# Altium PCB Team_Upsilon_Display_pcb.PcbDoc
Units mil, origin at the board's own origin, x right, y up, seen from the top; angles counter-clockwise.
Board outline 1925 x 1400 mil, 2 copper layers (Top Layer, Bottom Layer); 12 components, 18 nets, 40 pads, 0 vias.
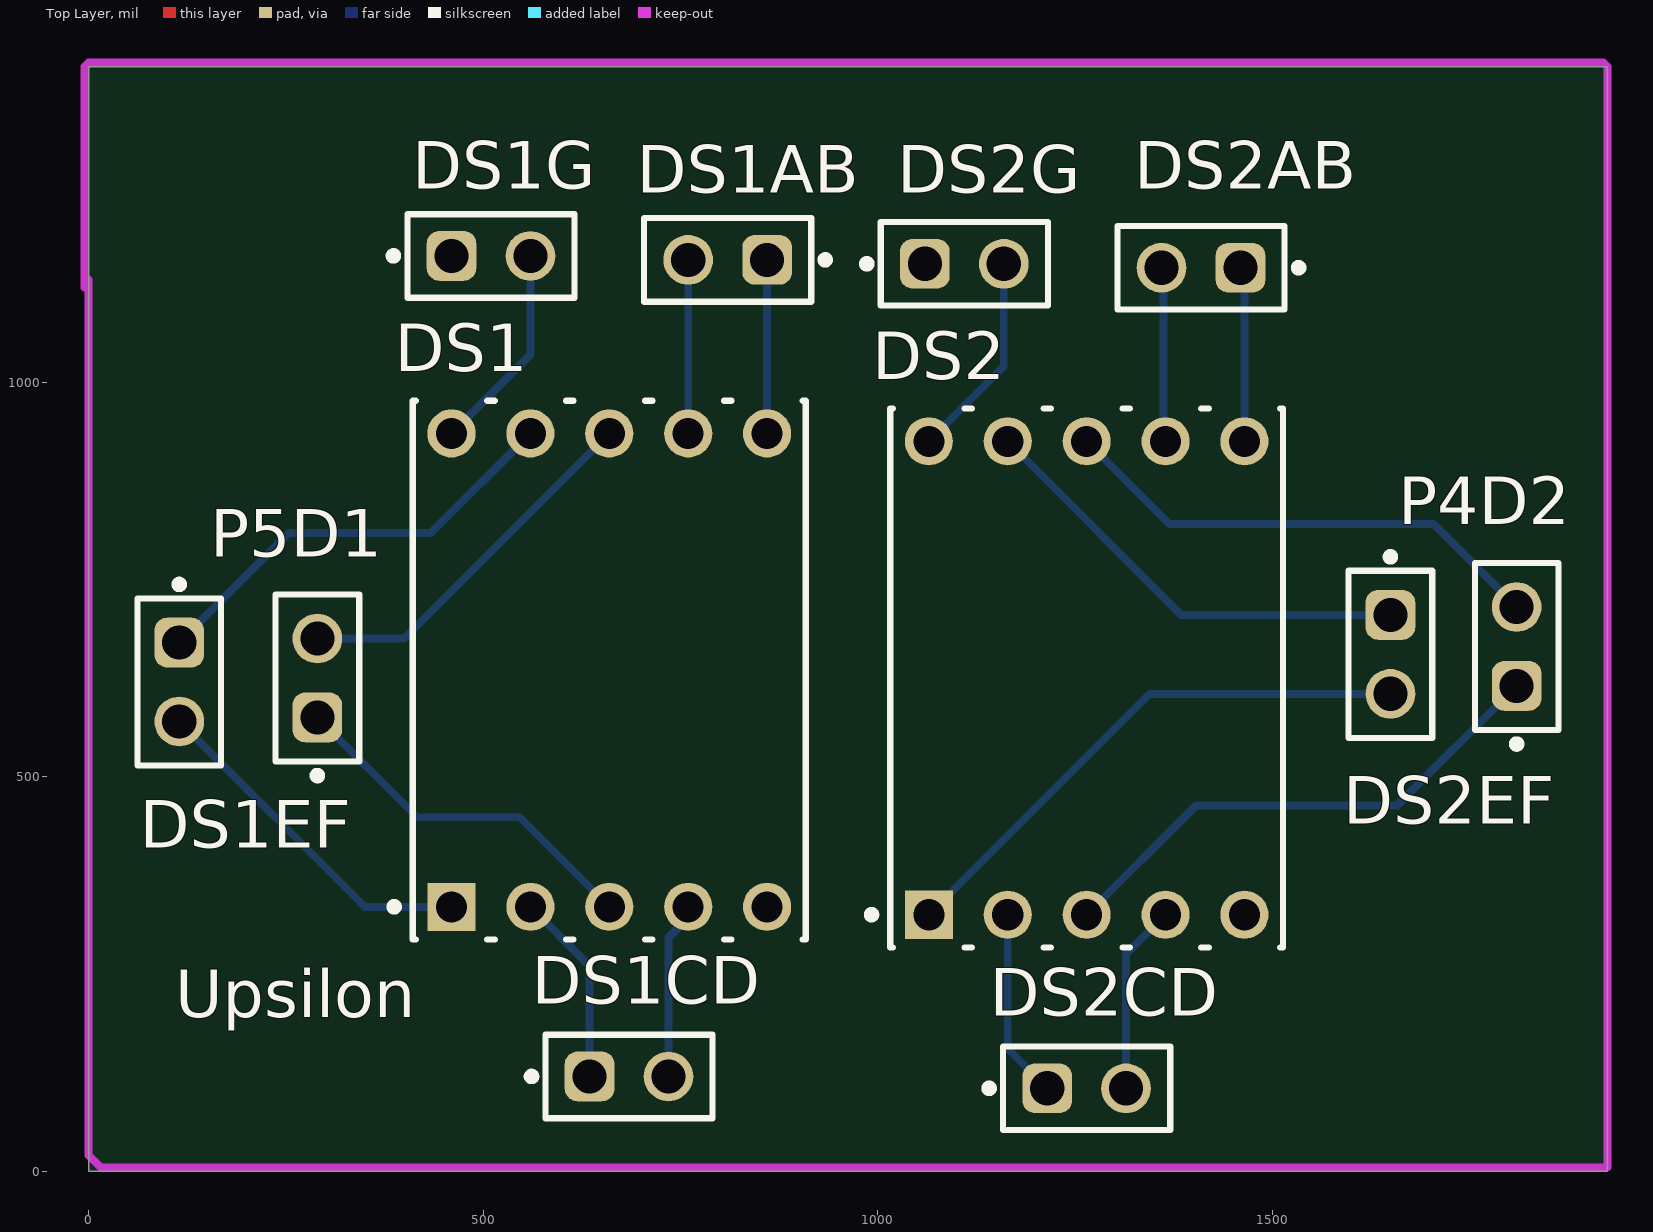
[diagram p0: Top Layer view]
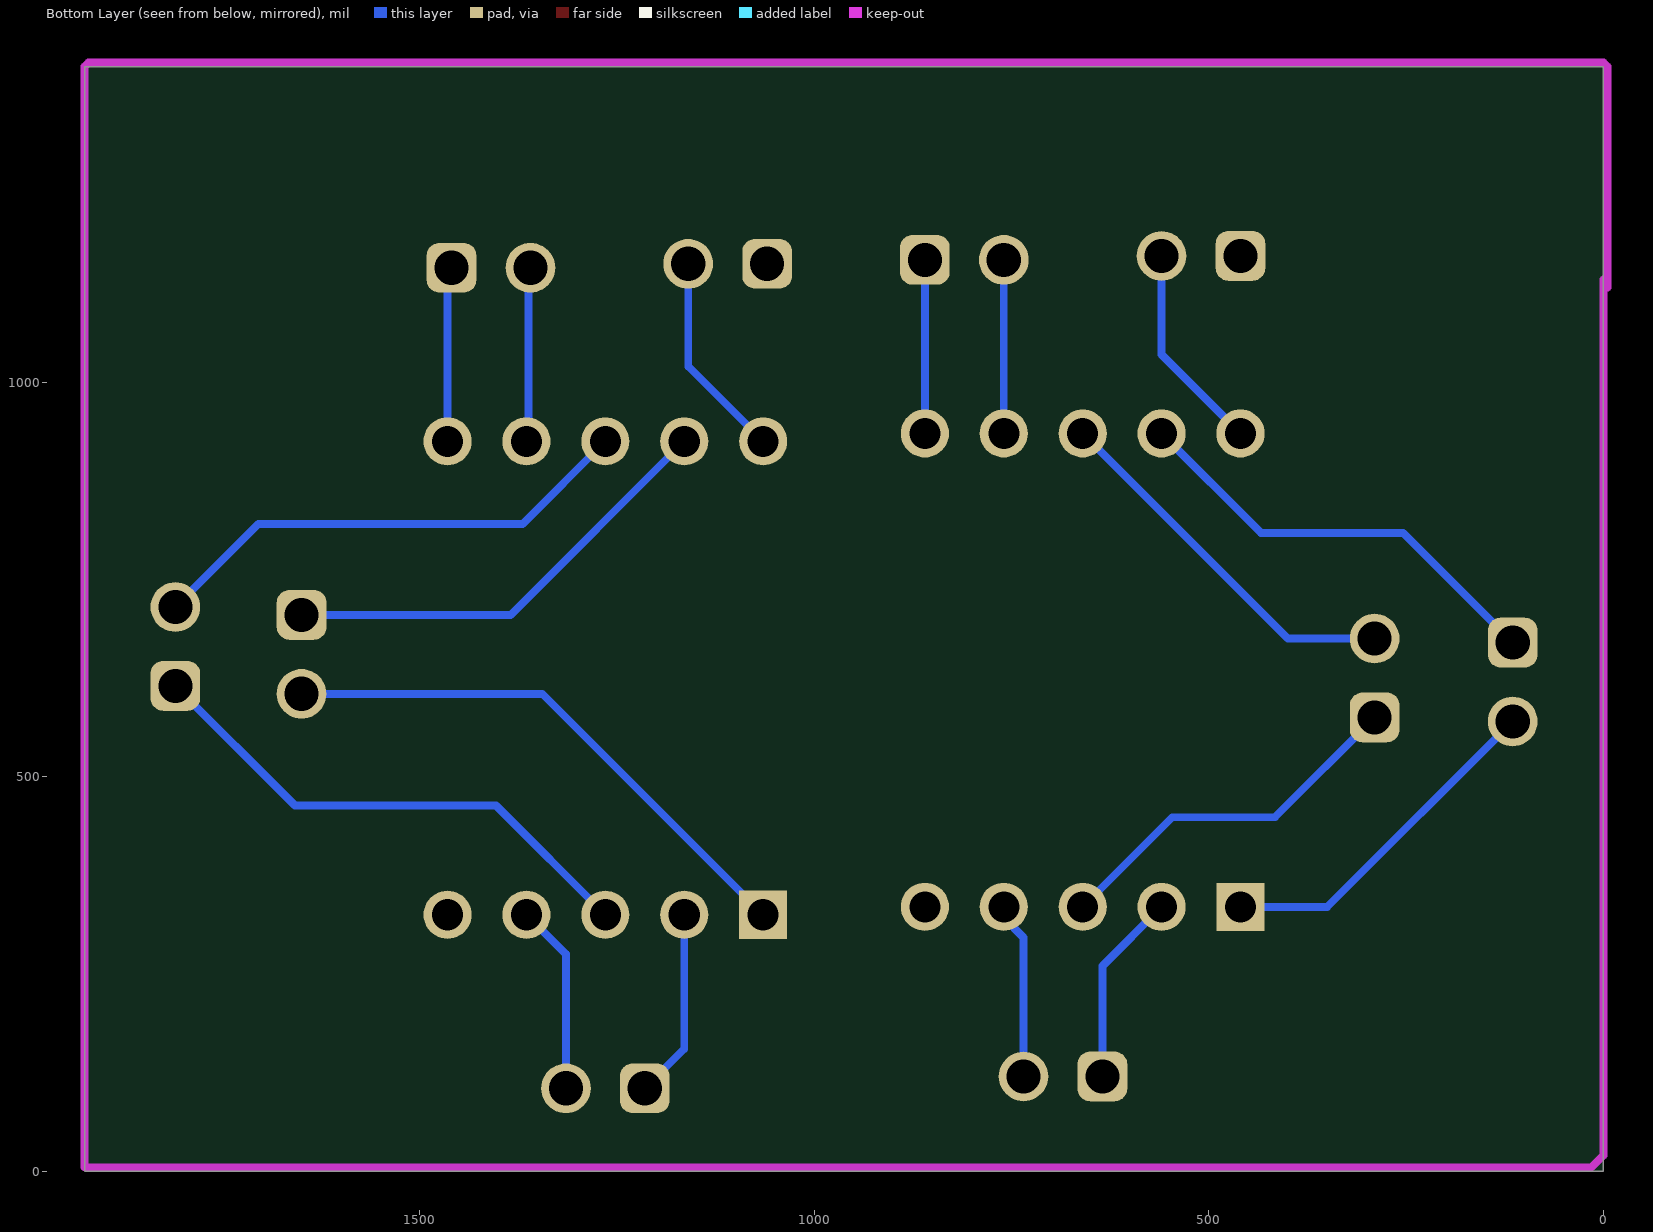
[diagram p1: Bottom Layer view, seen from below]
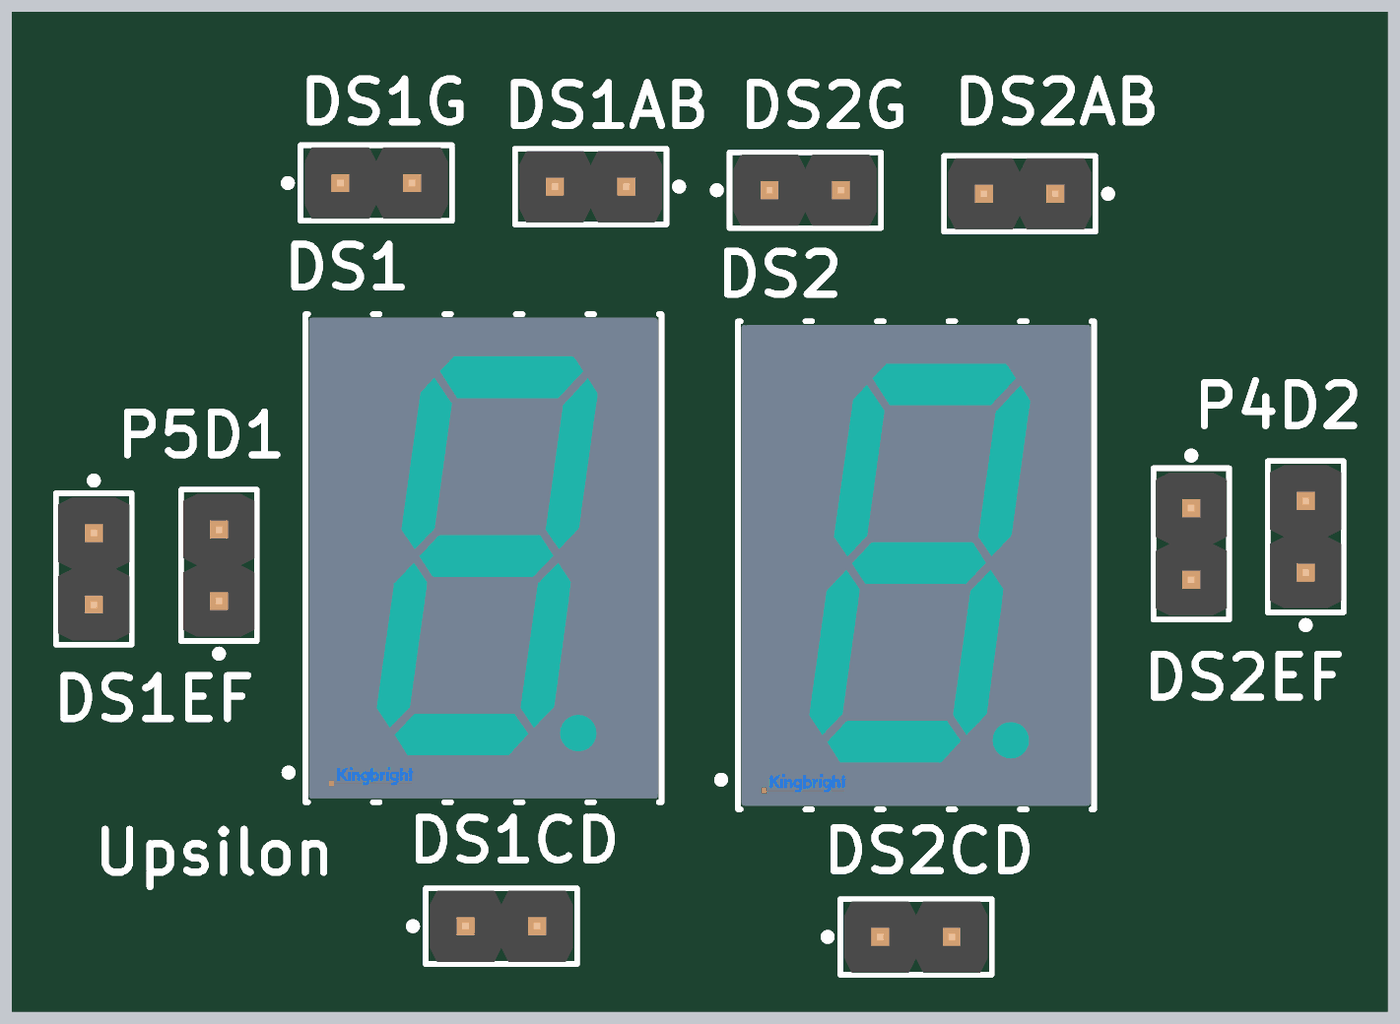
[diagram p2: 3D render of the assembled board from above, using the file's embedded part models]

## Layer stack, top to bottom
Top Solder: solder mask 0.4, Solder Resist, Dk 3.5
Top Layer: signal copper 1.4
Dielectric 1: dielectric 12.6, FR-4, Dk 4.8
Bottom Layer: signal copper 1.4
Bottom Solder: solder mask 0.4, Solder Resist, Dk 3.5

## Board outline
0,0 1925,0 1925,1400 0,1400

## Design rules (kind name [scope] priority, off if disabled: settings)
Clearance [All] p1: gap=10 ignorepadtopadclearanceinfootprint=FALSE
PolygonConnect [All] p1: connectstyle=Relief reliefconductorwidth=10 reliefentries=4 polygonreliefangle="90 Angle" airgapwidth=10
RoutingVias [All] p1: holewidth=28 width=50 viastyle="Through Hole" minholewidth=28 minwidth=50 maxholewidth=28 maxwidth=50
SolderMaskExpansion [All] p1: expansion=4 istentingtop=FALSE
Width [All] p1: maxlimit=10 minlimit=10 preferedwidth=10
30 further rules are at their usual default settings.

## Components (designator, comment, footprint, x,y, rotation, side; value= is the part's Value field where it differs from the comment)
DS1 "LSHD-5601" FP-LSHD-5601-MFG 660,635 r0 top
DS1AB "disp" 61300211121 810,1155 r180 top
DS1CD "disp" 61300211121 685,120 r0 top
DS1EF "disp" 61300211121 115,620 r270 top
DS1G "disp" 61300211121 510,1160 r0 top
DS2 "LSHD-5601" FP-LSHD-5601-MFG 1265,625 r0 top
DS2AB "disp" 61300211121 1410,1145 r180 top
DS2CD "disp" 61300211121 1265,105 r0 top
DS2EF "disp" 61300211121 1650,655 r270 top
DS2G "disp" 61300211121 1110,1150 r0 top
P4D2 "dispVCC" 61300211121 1810,665 r90 top
P5D1 "dispVCC" 61300211121 290,625 r90 top

## Footprints (in the part's own frame and the unit in brackets; to place one, negate y for a bottom-side part, rotate by r counter-clockwise, add the part's x,y. Pads: shape width x height; smd on the part's side, far side on the other; paste and mask are expansions set on the pad)
61300211121 [mm] "Pin Header, pitch 2.54 mm, THT, Vertical, single row, 2p"
  rrect50% 1.6x1.6 hole 1.1: 1(-1.27,0)
  round 1.6 hole 1.1: 2(1.27,0)
  silkscreen extent -3.26,-1.35 2.69,1.35, body extent -2.54,-1.27 2.54,1.27, height 8.57
FP-LSHD-5601-MFG [mm]
  rect 1.55x1.55 hole 1 paste-2539.97 mask+0: 1(-5.08,-7.62)
  round 1.55 hole 1 paste-2539.97 mask+0: 2(-2.54,-7.62) 3(0,-7.62) 4(2.54,-7.62) 5(5.08,-7.62) 6(5.08,7.62) 7(2.54,7.62) 8(0,7.62) 9(-2.54,7.62) 10(-5.08,7.62)
  silkscreen extent -7.05,-8.67 6.32,8.67, body extent -6.43,-8.77 6.43,8.77, height 0.25

## Part data
DS1 DS2: library part CMP-22013-000002-1, "LED 7-SEG .56\" GREEN 565NM CA", Forward Current=20mA, Forward Voltage=2.1V, Manufacturer=Lite-On, Reverse Voltage=5V, Temperature="-35°C to +105°C", Temperature Range High=+105°C, Temperature Range Low=-35°C, Automotive=No, Category=Disp, ComponentLink2Description=Datasheet, ComponentLink2URL=https://media.digikey.com/pdf/Data%20Sheets/Lite-On%20PDFs/LSHD-5601.pdf, Device Class L1=Optoelectronics, Device Class L2=Displays, Device Class L3="LED Displays", Digikey Description="LED 7-SEG .56\" GREEN 565NM CA", Display Type=LED, Element Config="Common Anode", Height=8.25mm, Lead Free=Yes, Luminous Intensity=2.4mcd, Manufacturer Part Number=LSHD-5601, Mouser Description="LED Displays & Accessories Green, Low Current 0.56, CARHD", Octopart=https://octopart.com/lshd-5601-lite-on-548440, Package=LSHD-5601, RoHS=TRUE, Test Current=20mA, Wavelength=569nm
DS1AB DS1CD DS1EF DS1G DS2AB DS2CD DS2EF DS2G P4D2 P5D1: library part CMP-1712-00002-6, Color=Black, Contact Resistance=20mΩ, Current Rating=3A, Max Operating Temperature=125°C, Min Operating Temperature=-40°C, Operating Supply Voltage=250V, Connector Type="Male Pin", Contact Gender=Male, Contact Material=Copper, Contact Mating Length=5.9944mm, Contact Plating=Gold, Gender=Male, Height=8.94mm, Housing Material=PBT, Lead Free="Lead Free", Lead Pitch=2.54mm, Mount="Through Hole", NexarPartId=20081794, Number of Contacts=2, Number of Pins=2, Number of Positions=2, Number of Rows=1, Orientation=Vertical, Packaging=Bulk, Pitch=2.54mm, REACH SVHC="No SVHC", RoHS=Compliant, Termination="Through Hole", Voltage Rating=250V

## Nets (pads, with @x,y where several pads share a name; then routed paths per layer and width w, separated by ;. In a path a pad name is that pad's centre, name@x,y a point inside that pad or via, vN(x,y) a via of type N, cw(c..) or ccw(c..) an arc to the next point about the centre after c; other vN are vias at no path point)
NetDS1_1: DS1.1 DS1EF.2 | length 442.3
  Bottom Layer w10: DS1EF.2 350,335 DS1.1
NetDS1_2: DS1.2 DS1CD.1 | length 246.1
  Bottom Layer w10: DS1.2 635,260 DS1CD.1
NetDS1_3: DS1.3 P5D1.1 | length 469.4
  Bottom Layer w10: P5D1.1 416.5,448.5 546.5,448.5 DS1.3
NetDS1_4: DS1.4 DS1CD.2 | length 225.4
  Bottom Layer w10: DS1CD.2 735,296.19 760,321.19 DS1.4
NetDS1_6: DS1.6 DS1AB.1 | length 220
  Bottom Layer w10: DS1.6 DS1AB.1
NetDS1_7: DS1.7 DS1AB.2 | length 220
  Bottom Layer w10: DS1.7 DS1AB.2
NetDS1_8: DS1.8 P5D1.2 | length 477.7
  Bottom Layer w10: P5D1.2 400,675 DS1.8
NetDS1_9: DS1.9 DS1EF.1 | length 554.8
  Bottom Layer w10: DS1EF.1 254,809 434,809 DS1.9
NetDS1_10: DS1.10 DS1G.2 | length 266.4
  Bottom Layer w10: DS1.10 560,1035 DS1G.2
NetDS2_1: DS2.1 DS2EF.2 | length 701
  Bottom Layer w10: DS2.1 1345,605 DS2EF.2
NetDS2_2: DS2.2 DS2CD.1 | length 240.7
  Bottom Layer w10: DS2.2 1165,155 DS2CD.1
NetDS2_3: DS2.3 P4D2.1 | length 665.1
  Bottom Layer w10: DS2.3 1403.5,463.5 1658.5,463.5 P4D2.1
NetDS2_4: DS2.4 DS2CD.2 | length 240.7
  Bottom Layer w10: DS2CD.2 1315,275 DS2.4
NetDS2_6: DS2.6 DS2AB.1 | length 222.1
  Bottom Layer w10: DS2AB.1 1465,1140 DS2.6
NetDS2_7: DS2.7 DS2AB.2 | length 222.1
  Bottom Layer w10: DS2AB.2 1362.5,1142.5 1362.5,927.5 DS2.7
NetDS2_8: DS2.8 P4D2.2 | length 632
  Bottom Layer w10: DS2.8 1369.81,820.19 1704.81,820.19 P4D2.2
NetDS2_9: DS2.9 DS2EF.1 | length 576.1
  Bottom Layer w10: DS2.9 1385,705 DS2EF.1
NetDS2_10: DS2.10 DS2G.2 | length 264.4
  Bottom Layer w10: DS2.10 1160,1020 DS2G.2
pads on no net: DS1.5 DS1G.1 DS2.5 DS2G.1

## Keep-outs
Keep-Out Layer:
  lines w10: -5,1120 -5,1400 0,1405 1920,1405 1925,1400 1925,5 15,5 0,20 0,1130

## Silkscreen, mask and mechanical layers (free items; w line width, h text height)
Top Overlay:
  text "Upsilon" at 110,194.99 h60